# Altium PCB Naive扩展板.PcbDoc
Units mil, origin at the board's own origin, x right, y up, seen from the top; angles counter-clockwise.
Board outline 1157 x 1033 mil, 2 copper layers (Top1, Bottom4), stack 42.17 mil thick; 16 components, 15 nets, 58 pads, 2 vias.
Unrouted connection lines stored in the file: 75.
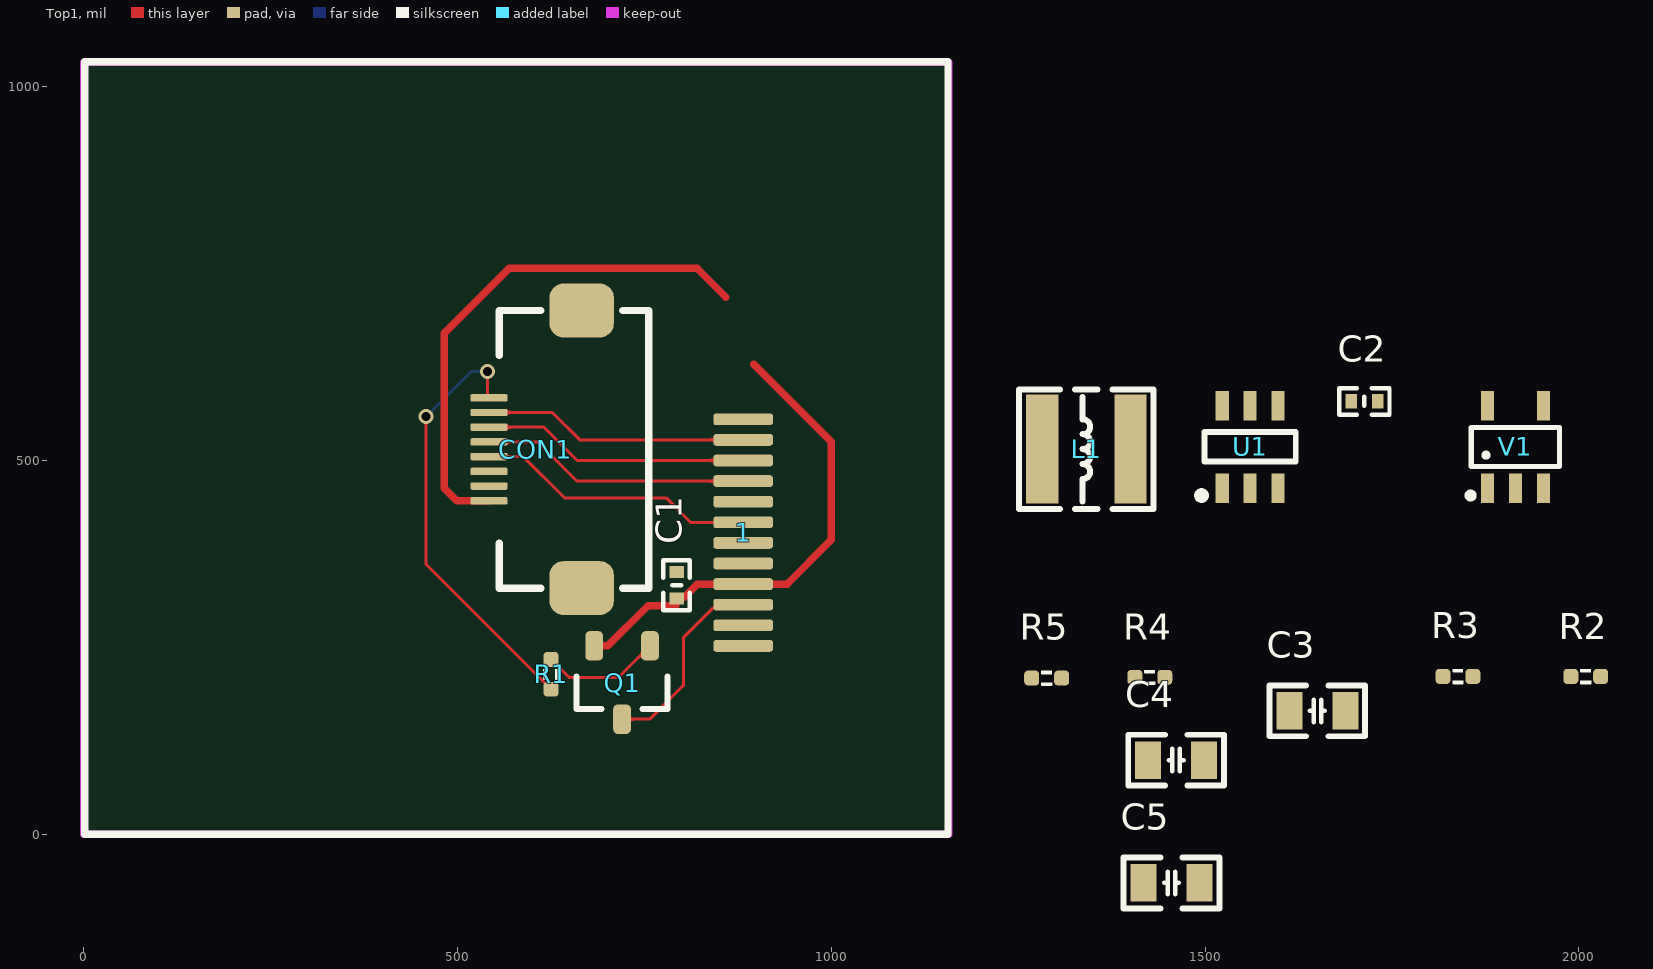
[diagram p0: Top1 view]
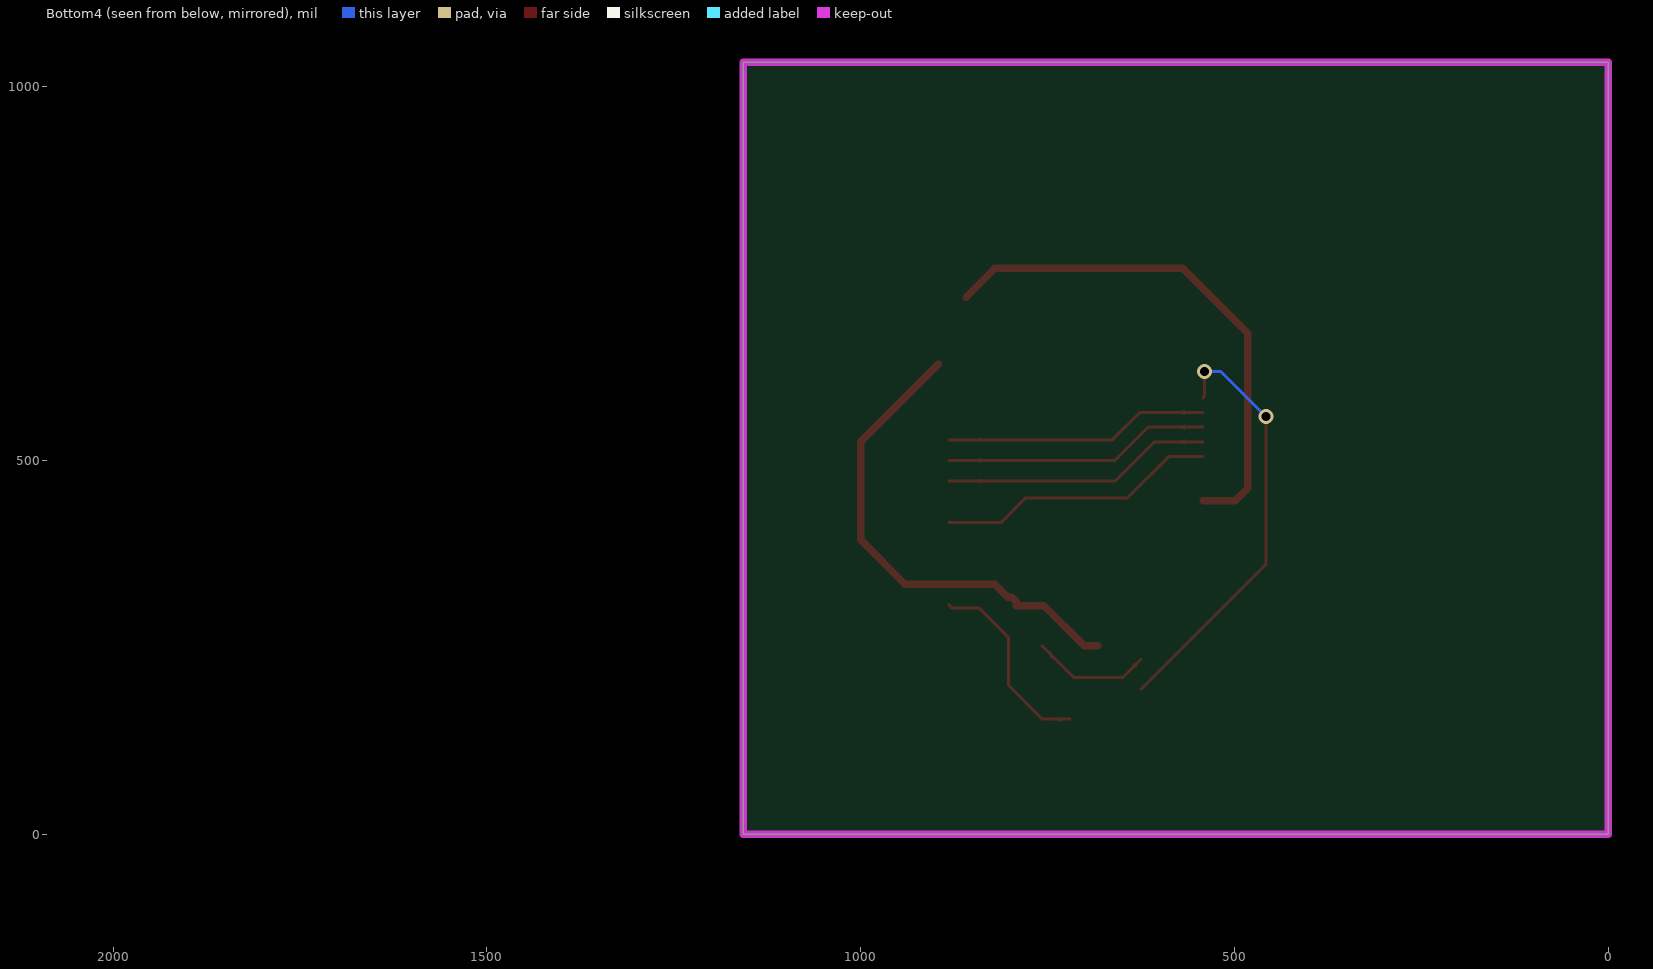
[diagram p1: Bottom4 view, seen from below]

## Layer stack, top to bottom
Top Solder: solder mask 0.4, Solder Resist, Dk 3.5
Top1: signal copper 1.4
Dielectric 2: core 39.37, PP-006, Dk 4.2
Bottom4: signal copper 1.4
Bottom Solder: solder mask 0.4, Solder Resist, Dk 3.5

## Board outline
0,0 1157,0 1157,1033 0,1033

## Design rules (kind name [scope] priority, off if disabled: settings)
Clearance [All] p1: gap=5 ignorepadtopadclearanceinfootprint=FALSE
ComponentClearance [All] p1: gap=0 collisioncheckmode=3 verticalgap=0 showdistances=FALSE
DiffPairsRouting [All] p1: maxlimit=9 minlimit=9 mostfreqgap=9 toplayer_minwidth=4 toplayer_maxwidth=4 toplayer_prefwidth=4 bottomlayer_minwidth=4 bottomlayer_maxwidth=4 bottomlayer_prefwidth=4 maxuncoupledlength=500
FanoutControl Fanout_BGA [All] p1: bgadir=Out bgaviamode=Centered fanoutstyle=Auto fanoutdirection=Alternating viagrid=1 // Fanout_BGA (Default Rule)
HoleSize [All] p1: absolutevalues=TRUE maxlimit=10000 minlimit=8 maxpercent=80.000 minpercent=20.000
MinimumSolderMaskSliver [All] p1 off: minsoldermaskwidth=2
PlaneClearance [All] p1: clearance=8
PlaneConnect [All] p1: planeconnectstyle=Direct reliefexpansion=20 reliefentries=4 reliefconductorwidth=10 reliefairgap=10
PolygonConnect [All] p1: connectstyle=Direct reliefconductorwidth=10 reliefentries=4 polygonreliefangle="90 Angle" airgapwidth=10
RoutingVias [All] p1: holewidth=8 width=16 viastyle="Through Hole" minholewidth=6 minwidth=12 maxholewidth=28 maxwidth=50
SilkToBoardRegionClearance [All] p1 off:
SilkToSilkClearance [All] p1: silktosilkclearance=0
SilkToSolderMaskClearance [IsPad] p1: minsilkscreentomaskgap=0 clearancetoexposedcopper=TRUE
SolderMaskExpansion [All] p1: expansion=3 istentingtop=FALSE
Width [All] p1: maxlimit=10000 minlimit=4 preferedwidth=4
20 further rules are at their usual default settings.

## Components (designator, comment, footprint, x,y, rotation, side; value= is the part's Value field where it differs from the comment)
1 "LCD-240x240" LCD-240X240-NOHOLE 675,534 r270 bottom locked
C1 "1uF" "C 0402_L" 793,333 r270 top
C2 "1uF" "C 0402_L" 1713.13,579.12 r0 top
C3 "22uF" "C 0805_L" 1650.13,165.12 r0 top
C4 "22uF" "C 0805_L" 1461.13,99.12 r0 top
C5 "22uF" "C 0805_L" 1455,-65 r0 top
CON1 "FFC_0.5_8" FFC_0.5_8 631,515 r90 top
L1 "6.8uH" NR4030 1341.13,515.12 r0 top
Q1 "AO3415A" SOT23-3 720,203 r270 top
R1 "1K" RES_0402 625,214 r90 top value=22R
R2 "100K" RES_0402 2009.13,211.12 r0 top value=22R
R3 "40.2K" RES_0402 1838.13,211.12 r0 top value=22R
R4 "40.2K" RES_0402 1426,210 r0 top value=22R
R5 "13K" RES_0402 1288,209 r0 top value=22R
U1 "MP1471 降压芯片" SOT23-6L 1560.13,518.12 r0 top
V1 "ME6211" SOT23-5L 1915.13,518.12 r0 top

## Footprints (in the part's own frame and the unit in brackets; to place one, negate y for a bottom-side part, rotate by r counter-clockwise, add the part's x,y. Pads: shape width x height; smd on the part's side, far side on the other; paste and mask are expansions set on the pad)
"C 0402_L" [mm] "无极性贴片电容"
  rect 0.4x0.5 smd: 1(-0.45,0) 2(0.45,0)
  silkscreen extent -0.85,-0.45 0.85,0.45, body extent -0.5,-0.26 0.5,0.26, height 0.53
"C 0805_L" [mil] "无极性贴片电容"
  rect 35x50 smd: 1(-37.4,0) 2(37.4,0)
  silkscreen extent -64,-34 64,34, body extent -39,-24 39,24, height 20
FFC_0.5_8 [mil]
  rrect50% 72x86 smd: 0(-185.63,-35) 0(185.63,-35)
  rrect50% 10x50 smd: 1(-68.9,89) 2(-49.21,89) 3(-29.53,89) 4(-9.84,89) 5(9.84,89) 6(29.53,89) 7(49.21,89) 8(68.9,89)
  silkscreen extent -186,-125 186,75, body extent -187,-124 187,87, height 82
LCD-240X240-NOHOLE [mil]
  rrect50% 15.75x80 smd far side: 1(282,-207) 2(254.44,-207) 3(226.88,-207) 4(199.32,-207) 5(171.76,-207) 6(144.2,-207) 7(116.65,-207) 8(89.09,-207) 9(61.53,-207) 10(33.97,-207) 11(6.41,-207) 12(-21.15,-207)
  body extent -499,-565 534,673, height 20
NR4030 [mm] "4.0mm*4.0mm*3.0mm(长*宽*高）"
  rect 1.1x3.7 smd: 1(-1.5,0) 2(1.5,0)
  silkscreen extent -2.29,-2.03 2.29,2.03, body extent -2,-2 2,2, height 3.1
RES_0402 [mil]
  rrect50% 20x20 smd: 1(-20,0) 2(20,0)
  silkscreen extent -7,-10 7,10, body extent -20,-10 20,10, height 14
SOT23-3 [mm] "SOT23, 3-Leads, Body 3.1x3.0mm (max), Pitch 0.95mm, IPC Medium Density"
  rrect50% 1x0.6 smd: 1(-1.246,0.95) 2(-1.246,-0.95) 3(1.246,0)
  silkscreen extent -0.2,-1.55 0.9,1.55, body extent -1.3,-1.45 1.5,1.45, height 1.2
SOT23-5L [mm] "3x1.6x1.1mm(长宽高)"
  rect 0.45x1 smd: 1(-0.95,-1.4) 2(0,-1.4) 3(0.95,-1.4) 4(0.95,1.4) 5(-0.95,1.4)
  silkscreen extent -1.6,-1.73 1.5,0.66, body extent -1.5,-1.4 1.5,1.4, height 1.15
SOT23-6L [mm] "3x1.6x1.1mm(长宽高)"
  rect 0.45x1 smd: 1(-0.95,-1.397) 2(0,-1.397) 3(0.95,-1.397) 4(0.95,1.397) 5(0,1.397) 6(-0.95,1.397)
  silkscreen extent -1.77,-1.78 1.55,0.51, body extent -1.5,-1.4 1.5,1.4, height 1.15

## Part data
1: "显示屏"
C1 C2 C3 C4 C5: library part C, "无极性贴片电容", BOM名称=无极性贴片电容, 材质=X7R
CON1: "FFC", System=Connector
L1: library part L-NR, "NR磁胶电感", BOM名称=NR磁胶电感
Q1: "MOSFET", LatestRevisionDate=17-Jul-2002, LatestRevisionNote="Re-released for DXP Platform.", PackageDescription="TO, Flat Index; 3 In-Line, Axial Leads; Body Dia. 4.6mm; Lead Dia. 0.5 mm (max)", PackageReference=E3, PackageVersion=1995/1996, Published=8-Jun-2000, Publisher="Altium Limited"
R1 R2 R3 R4 R5: library part 电阻-0402, "Resistor"
U1: library part MP1471, "DC降压芯片", BOM名称=DC降压芯片
V1: "低功耗LDO", BOM名称=低功耗LDO

## Via types
v1: diameter 20, hole 12, Top1 to Bottom4, 2 vias

## Nets (pads, with @x,y where several pads share a name; then routed paths per layer and width w, separated by ;. In a path a pad name is that pad's centre, name@x,y a point inside that pad or via, vN(x,y) a via of type N, cw(c..) or ccw(c..) an arc to the next point about the centre after c; other vN are vias at no path point)
3V3: 1.4 C1.1 C3.2 C4.2 CON1.2 L1.1 Q1.2 R3.2 V1.5 | length 656.9
  Top1 w10: Q1.2 701.06,252.06 755,306 792,306 792,311 798,317 803,317 820.68,334.68 1.4 940.68,334.68 1000,394 1000,525 896.2,628.8
DC: 1.7 CON1.4 | length 377.3
  Top1 w4: CON1.4 587.84,505.16 643,450 779,450 811.65,417.35 1.7 1.7@881.35,418
FB: R4.2 U1.4
GND: 1.1 1.2 1.5 1.6 1.8 1.12 C1.2 C3.1 C4.1 C5.1 CON1.3 R5.2 U1.1 V1.2
LCD_BL: CON1.8 R1.1 | length 576.8
  Top1 w4: v1(458,558.7) 458,361 602,217 R1.1 ; v1(540,619) 540,585.9 CON1.8
  Bottom4 w4: v1(458,558.7) 518.3,619 v1(540,619)
LCD_BL_VCC: 1.3 Q1.3 | length 262.9
  Top1 w4: Q1.3 756.94,153.94 802,199 802,263 841.44,302.44 877.32,302.44 1.3
MOSI: 1.10 CON1.6 | length 358.4
  Top1 w4: CON1.6 615.47,544.53 659.97,500.03 1.10
NetC2_1: C2.1 U1.6
NetC2_2: C2.2 L1.2 U1.2
NetQ1_1: Q1.1 R1.2 | length 159.8
  Top1 w4: R1.2 649,210 715.35,210 Q1.1
NetR2_1: R2.1 U1.5
NetR3_1: R3.1 R4.1 R5.1
RES: 1.11 CON1.7 | length 355.2
  Top1 w4: CON1.7 626.79,564.21 663.41,527.59 1.11
SCK: 1.9 CON1.5 | length 361.7
  Top1 w4: CON1.5 607.16,524.84 659.53,472.47 1.9
VDD_5V: C5.2 CON1.1 R2.2 U1.3 V1.1 V1.3 | length 703.1
  Top1 w10: CON1.1 498.9,446.1 482,463 482,670 569,757 820.29,757 859,718.29
pads on no net: CON1.0 V1.4

## Keep-outs
Keep-Out Layer:
  the board outline again, w10